# Altium PCB Thruster Driver Board.PcbDoc (part 1 of 2)
Units mil, origin at the board's own origin, x right, y up, seen from the top; angles counter-clockwise.
Board outline 7035 x 3025 mil, 4 copper layers (Top Layer, Ground Plane, Power Plane, Bottom Layer); 146 components, 107 nets, 533 pads, 443 vias.
Unrouted connection lines stored in the file: 1.
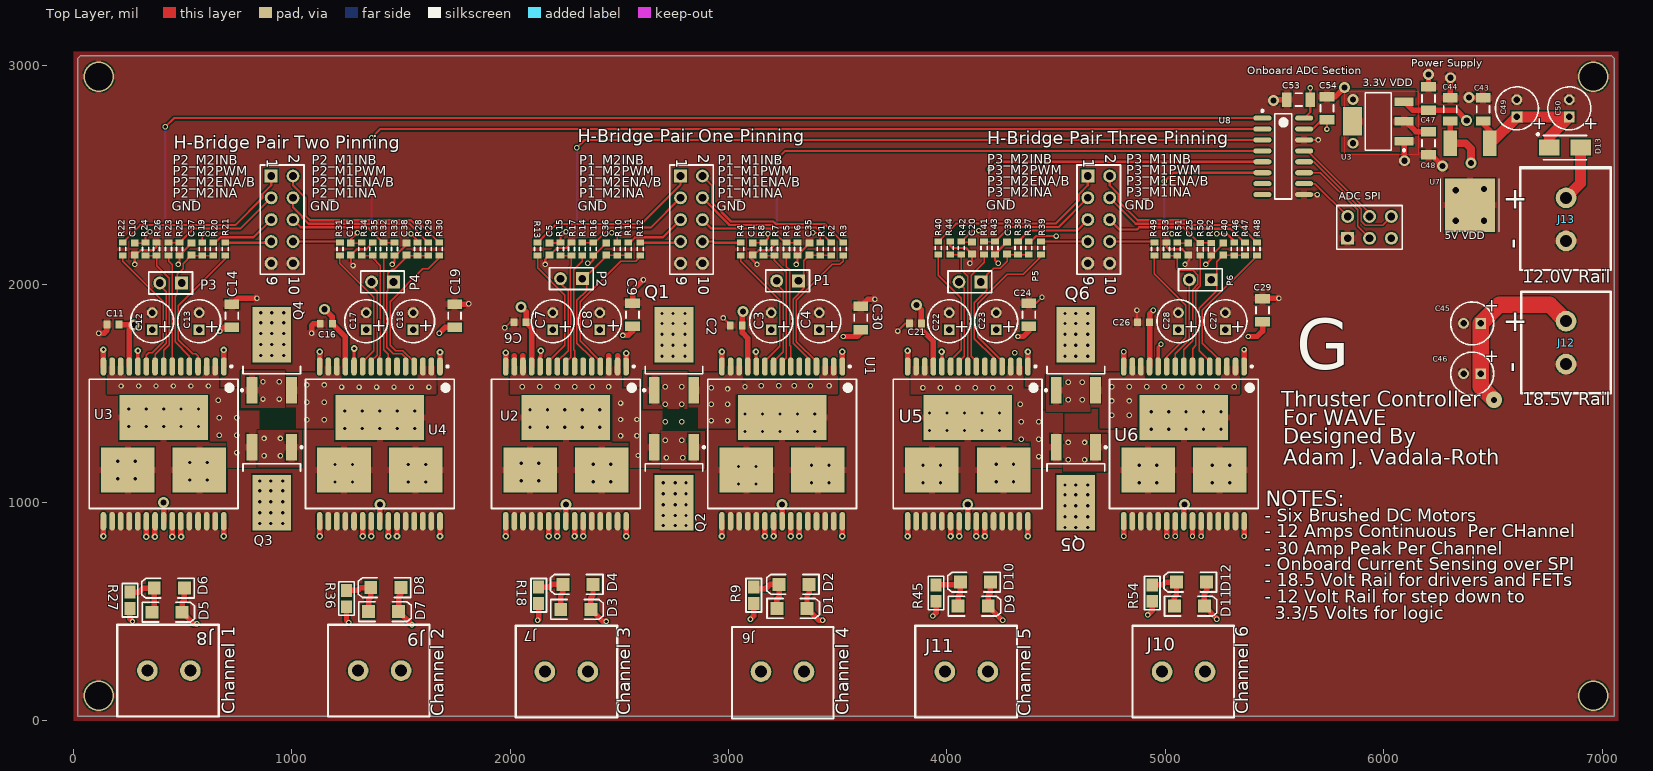
[diagram p0: Top Layer view]
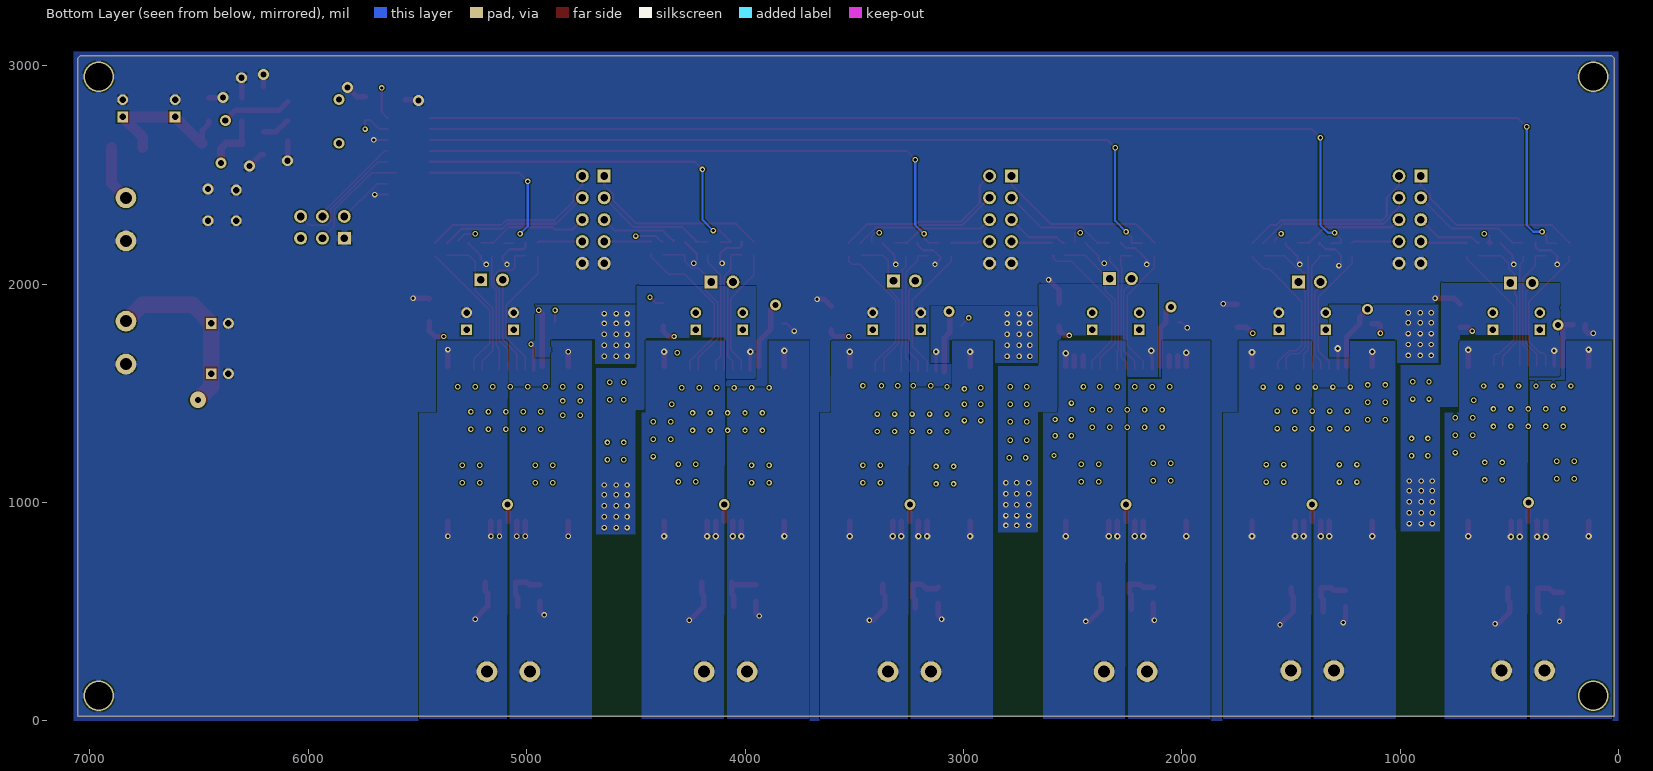
[diagram p1: Bottom Layer view, seen from below]
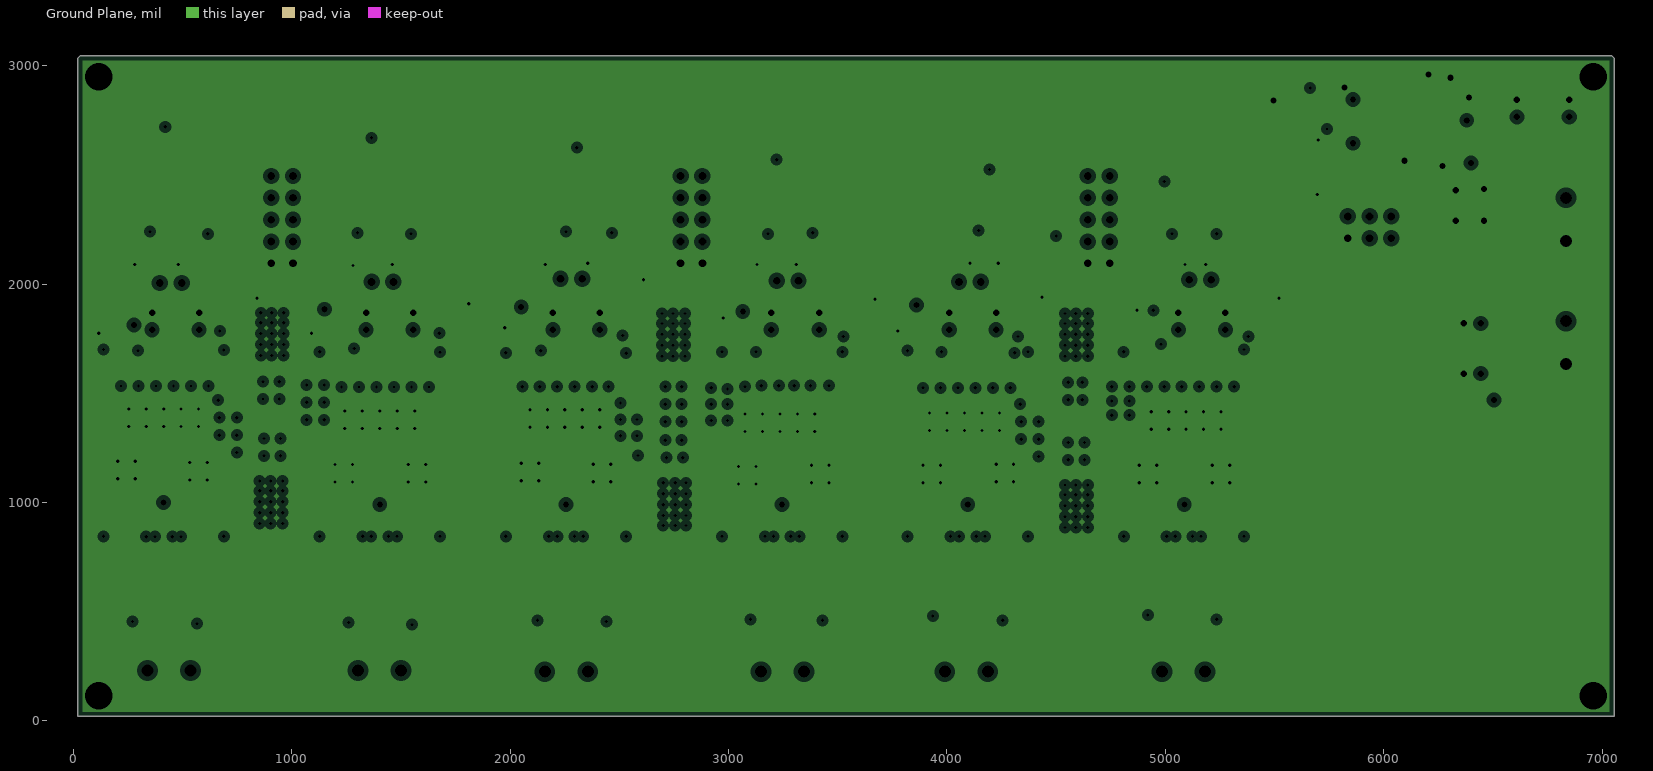
[diagram p2: Ground Plane, clearances drawn from the general rule]
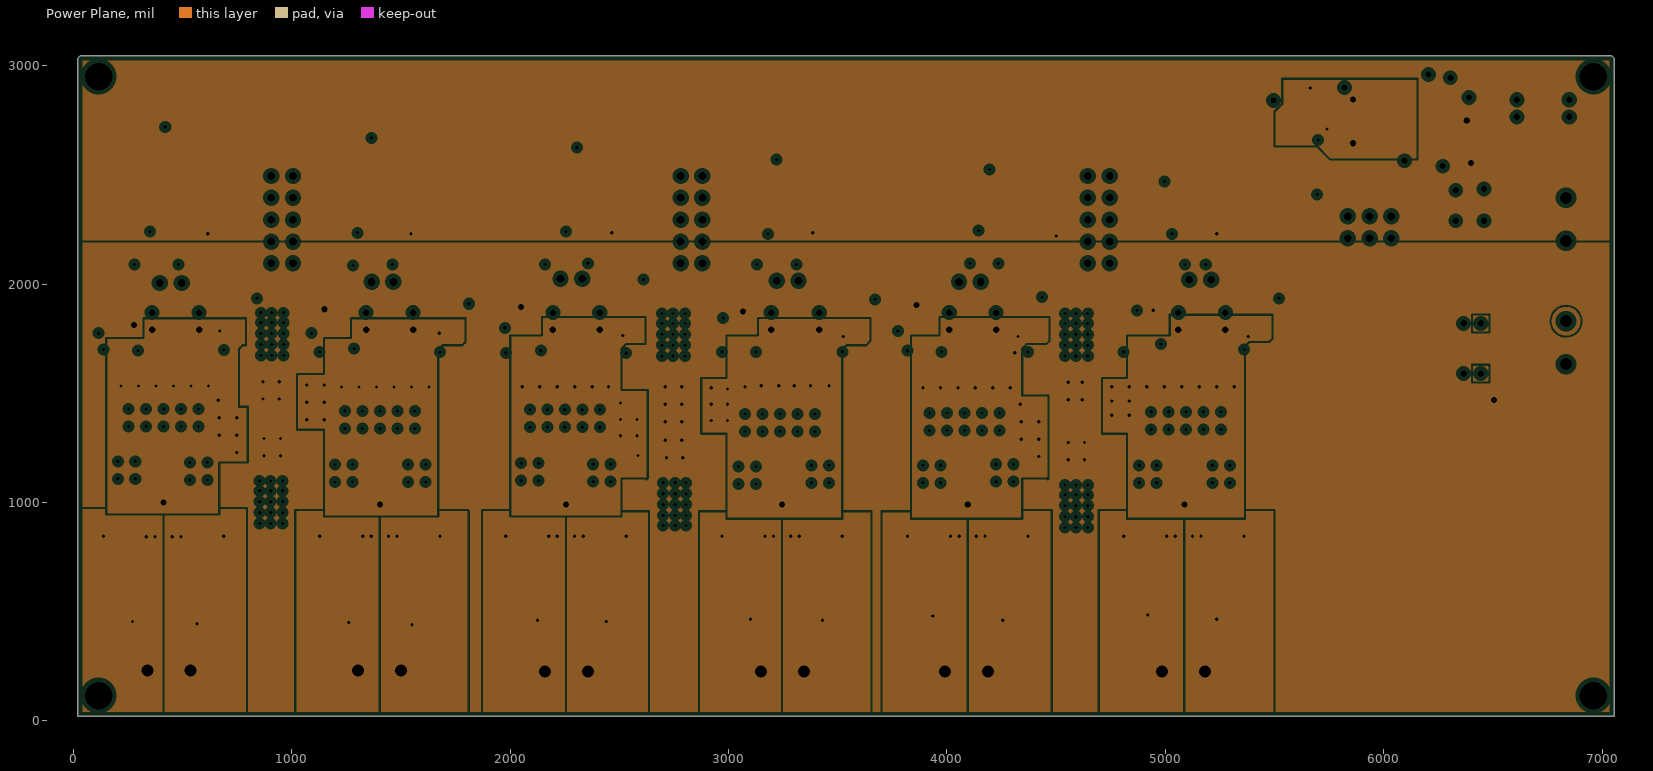
[diagram p3: Power Plane, clearances drawn from the general rule]

## Layer stack, top to bottom
Top Layer: signal copper 1.4
Dielectric: core 12.6, FR-4, Dk 4.8
Ground Plane: plane copper 1.4, net GND
Dielectric: prepreg 12.6, FR-4, Dk 4.8
Power Plane: plane copper 1.4, net (Multiple Nets)
Dielectric: core 12.6, FR-4, Dk 4.8
Bottom Layer: signal copper 1.4

## Board outline
20,20 7055,20 7055,3035 7045,3045 30,3045 20,3035

## Design rules (kind name [scope] priority, off if disabled: settings)
Clearance [All] p1: gap=6
HoleSize [All] p1: absolutevalues=TRUE maxlimit=100 minlimit=15 maxpercent=80.000 minpercent=20.000
HoleToHoleClearance [All] p1: gap=6 allowstackedmicrovias=TRUE
PlaneClearance [All] p1: clearance=20
PlaneConnect [All] p1: planeconnectstyle=Relief reliefexpansion=10 reliefentries=4 reliefconductorwidth=15 reliefairgap=5
PolygonConnect [All] p1: connectstyle=Relief reliefconductorwidth=30 reliefentries=4 polygonreliefangle="90 Angle"
RoutingVias [All] p1: holewidth=28 width=50 viastyle="Through Hole" minholewidth=15 minwidth=25 maxholewidth=28 maxwidth=50
SilkscreenOverComponentPads [All] p1: minsilkscreentomaskgap=10
SolderMaskExpansion [All] p1: expansion=4
Width [All] p1: maxlimit=100 minlimit=6 preferedwidth=6
23 further rules are at their usual default settings.

## Classes and differential pairs
component class "Motor and Power IO": C43 C44 C45 C46 C47 C48 C49 C50 D13 J6 J7 J8 J9 J10 J11 J12 J13 U3 U7
component class "AHD Breakout": "ADC SPI" C53 C54 P8 P9 P10 U8
component class "Thruster Pair 2": C10 C11 C12 C13 C14 C15 C16 C17 C18 C19 C37 C38 D5 D6 D7 D8 P3 P4 Q3 Q4 R19 R20 R21 R22 R23 R24 R25 R26 R27 R28 R29 R30 R31 R32 R33 R34 R35 R36 U4
component class "Thruster Pair 1": C1 C2 C3 C4 C5 C6 C7 C8 C9 C30 C35 C36 D1 D2 D3 D4 P1 P2 Q1 Q2 R1 R2 R3 R4 R5 R6 R7 R8 R9 R10 R11 R12 R13 R14 R15 R16 R17 R18 U1 U2
component class "Thruster Pair 3": C20 C21 C22 C23 C24 C25 C26 C27 C28 C29 C39 C40 D9 D10 D11 D12 P5 P6 Q5 Q6 R37 R38 R39 R40 R41 R42 R43 R44 R45 R46 R47 R48 R49 R50 R51 R52 R53 R54 U5 U6

## Components (designator, comment, footprint, x,y, rotation, side; value= is the part's Value field where it differs from the comment)
"ADC SPI" "Header 3X2" HDR2X3 5835,2210 r0 top
C1 "Cap Semi" 1608[0603] 3110,2160 r90 top
C2 "Cap Semi" 1608[0603] 3035,1810 r0 top
C3 "Cap Pol2" CAPPR2-5x6.8 3195,1830 r90 top
C4 "Cap Pol2" CAPPR2-5x6.8 3415,1830 r90 top
C5 "Cap Semi" 1608[0603] 2180,2160 r90 top
C6 "Cap Semi" 1608[0603] 2045,1825 r0 top
C7 "Cap Pol2" CAPPR2-5x6.8 2195,1830 r90 top
C8 "Cap Pol2" CAPPR2-5x6.8 2410,1830 r90 top
C9 "Cap Semi" C1206 2560,1860 r270 top
C10 "Cap Semi" 1608[0603] 280,2160 r90 top
C11 "Cap Semi" 1608[0603] 180,1815 r0 top
C12 "Cap Pol2" CAPPR2-5x6.8 360,1830 r90 top
C13 "Cap Pol2" CAPPR2-5x6.8 575,1830 r90 top
C14 "Cap Semi" C1206 725,1855 r270 top
C15 "Cap Semi" 1608[0603] 1270,2160 r90 top
C16 "Cap Semi" 1608[0603] 1157.61,1818.34 r0 top
C17 "Cap Pol2" CAPPR2-5x6.8 1340,1830 r90 top
C18 "Cap Pol2" CAPPR2-5x6.8 1555,1830 r90 top
C19 "Cap Semi" C1206 1745,1855 r270 top
C20 "Cap Semi" 1608[0603] 4115,2165 r90 top
C21 "Cap Semi" 1608[0603] 3855,1820 r0 top
C22 "Cap Pol2" CAPPR2-5x6.8 4010,1830 r90 top
C23 "Cap Pol2" CAPPR2-5x6.8 4225,1830 r90 top
C24 "Cap Semi" C1206 4375,1860 r270 top
C25 "Cap Semi" 1608[0603] 5105,2160 r90 top
C26 "Cap Semi" 1608[0603] 4900,1825 r0 top
C27 "Cap Pol2" CAPPR2-5x6.8 5275,1830 r90 top
C28 "Cap Pol2" CAPPR2-5x6.8 5060,1830 r90 top
C29 "Cap Semi" C1206 5445,1880 r270 top
C30 "Cap Semi" C1206 3605,1845 r270 top
C35 "Cap Semi" 1608[0603] 3370,2160 r270 top
C36 "Cap Semi" 1608[0603] 2440,2160 r270 top
C37 "Cap Semi" 1608[0603] 540,2160 r270 top
C38 "Cap Semi" 1608[0603] 1525,2160 r270 top
C39 "Cap Semi" 1608[0603] 4275,2165 r270 top
C40 "Cap Semi" 1608[0603] 5265,2160 r270 top
C43 "Cap Semi" C1206 6455,2800 r270 top
C44 "Cap Semi" C1206 6305,2800 r270 top
C45 "Cap Pol2" CAPPR2-5x6.8 6405,1820 r180 top
C46 "Cap Pol2" CAPPR2-5x6.8 6405,1590 r180 top
C47 "Cap Semi" C1206 6205,2850 r270 top
C48 "Cap Semi" C1206 6205,2645 r90 top
C49 "Cap Pol2" CAPPR2-5x6.8 6610,2805 r90 top
C50 "Cap Pol2" CAPPR2-5x6.8 6850,2805 r90 top
C53 "Cap Semi" C1206 5610,2845 r180 top
C54 "Cap Semi" C1206 5740,2805 r90 top
D1 "LED2" 3.2X1.6X1.1 3290,515 r0 top
D2 "LED2" 3.2X1.6X1.1 3300,625 r180 top
D3 "LED2" 3.2X1.6X1.1 2300,510 r0 top
D4 "LED2" 3.2X1.6X1.1 2310,625 r180 top
D5 "LED2" 3.2X1.6X1.1 428.34,497.39 r0 top
D6 "LED2" 3.2X1.6X1.1 438.34,607.39 r180 top
D7 "LED2" 3.2X1.6X1.1 1420,500 r0 top
D8 "LED2" 3.2X1.6X1.1 1430,610 r180 top
D9 "LED2" 3.2X1.6X1.1 4120,525 r0 top
D10 "LED2" 3.2X1.6X1.1 4130,635 r180 top
D11 "LED2" 3.2X1.6X1.1 5110,525 r0 top
D12 "LED2" 3.2X1.6X1.1 5120,635 r180 top
D13 "PMEG4050EP" PMEG4050EP 6830,2625 r0 top
"H-Bridge Pair One Pinning" "Header 5X2" HDR2X5 2780,2495 r270 top (schematic designator P8)
"H-Bridge Pair Three Pinning" "Header 5X2" HDR2X5 4645,2495 r270 top (schematic designator P10)
"H-Bridge Pair Two Pinning" "Header 5X2" HDR2X5 905,2495 r270 top locked (schematic designator P9)
J6 "282856-2" 282856-2 3345,225 r180 top
J7 "282856-2" 282856-2 2355,225 r180 top
J8 "282856-2" 282856-2 535,230 r180 top
J9 "282856-2" 282856-2 1500,230 r180 top
J10 "282856-2" 282856-2 4985,225 r0 top
J11 "282856-2" 282856-2 3990,225 r0 top
J12 "282856-2" 282856-2 6835,1830 r270 top
J13 "282856-2" 282856-2 6835,2395 r270 top
P1 "Header 2" HDR1X2 3320,2015 r180 top
P2 "Header 2" HDR1X2 2330,2025 r180 top
P3 "Header 2" HDR1X2 495,2005 r180 top
P4 "Header 2" HDR1X2 1465,2010 r180 top
P5 "Header 2" HDR1X2 4155,2010 r180 top
P6 "Header 2" HDR1X2 5210,2020 r180 top
Q1 "IRFR3707ZPBF" IRFR3707ZPBF 2750,1673.34 r90 top
Q2 "IRFR3707ZPBF" IRFR3707ZPBF 2750,1093.34 r270 top
Q3 "IRFR3707ZPBF" IRFR3707ZPBF 907.61,1093.34 r270 top
Q4 "IRFR3707ZPBF" IRFR3707ZPBF 907.61,1673.34 r90 top
Q5 "IRFR3707ZPBF" IRFR3707ZPBF 4590,1093.34 r270 top
Q6 "IRFR3707ZPBF" IRFR3707ZPBF 4590,1673.34 r90 top
R1 "Res3" RESC1608L 3420,2160 r90 top
R2 "Res3" RESC1608L 3470,2160 r270 top
R3 "Res3" RESC1608L 3525,2160 r270 top
R4 "Res3" RESC1608L 3055,2160 r270 top
R5 "Res3" RESC1608L 3265,2160 r270 top
R6 "Res3" RESC1608L 3315,2160 r90 top
R7 "Res3" RESC1608L 3210,2160 r270 top
R8 "Res3" RESC1608L 3160,2160 r270 top
R9 "Res3" "0805 SMD Resistor" 3115,575 r90 top
R10 "Res3" RESC1608L 2490,2160 r90 top
R11 "Res3" RESC1608L 2540,2160 r270 top
R12 "Res3" RESC1608L 2595,2160 r270 top
R13 "Res3" RESC1608L 2125,2160 r270 top
R14 "Res3" RESC1608L 2330,2160 r270 top
R15 "Res3" RESC1608L 2230,2160 r270 top
R16 "Res3" RESC1608L 2380,2160 r90 top
R17 "Res3" RESC1608L 2280,2160 r270 top
R18 "Res3" "0805 SMD Resistor" 2130,575 r90 top
R19 "Res3" RESC1608L 590,2160 r90 top
R20 "Res3" RESC1608L 640,2160 r270 top
R21 "Res3" RESC1608L 695,2160 r270 top
R22 "Res3" RESC1608L 225,2160 r270 top
R23 "Res3" RESC1608L 435,2160 r270 top
R24 "Res3" RESC1608L 330,2160 r270 top
R25 "Res3" RESC1608L 485,2160 r90 top
R26 "Res3" RESC1608L 380,2160 r270 top
R27 "Res3" "0805 SMD Resistor" 258.34,552.39 r90 top
R28 "Res3" RESC1608L 1575,2160 r90 top
R29 "Res3" RESC1608L 1625,2160 r270 top
R30 "Res3" RESC1608L 1675,2160 r270 top
R31 "Res3" RESC1608L 1220,2160 r270 top
R32 "Res3" RESC1608L 1420,2160 r270 top
R33 "Res3" RESC1608L 1470,2160 r90 top
R34 "Res3" RESC1608L 1320,2160 r270 top
R35 "Res3" RESC1608L 1370,2160 r270 top
R36 "Res3" "0805 SMD Resistor" 1250,560 r90 top
R37 "Res3" RESC1608L 4375,2165 r90 top
R38 "Res3" RESC1608L 4325,2165 r270 top
R39 "Res3" RESC1608L 4430,2165 r270 top
R40 "Res3" RESC1608L 3960,2165 r270 top
R41 "Res3" RESC1608L 4170,2165 r270 top
R42 "Res3" RESC1608L 4065,2165 r270 top
R43 "Res3" RESC1608L 4220,2165 r90 top
R44 "Res3" RESC1608L 4015,2165 r270 top
R45 "Res3" "0805 SMD Resistor" 3950,585 r90 top
R46 "Res3" RESC1608L 5315,2160 r90 top
R47 "Res3" RESC1608L 5365,2160 r270 top
R48 "Res3" RESC1608L 5420,2160 r270 top
R49 "Res3" RESC1608L 4950,2160 r270 top
R50 "Res3" RESC1608L 5160,2159.53 r270 top
R51 "Res3" RESC1608L 5055,2160 r270 top
R52 "Res3" RESC1608L 5210,2159.53 r90 top
R53 "Res3" RESC1608L 5005,2160 r270 top
R54 "Res3" "0805 SMD Resistor" 4940,585 r90 top
U1 "VNH5019A-E" VNH5019A-E 3245,1268.34 r270 top
U2 "VNH5019A-E" VNH5019A-E 2255,1268.34 r270 top
U3 "NX1117CE33Z" NX1117CE33Z 5975,2745 r180 top
U3 "VNH5019A-E" VNH5019A-E 412.61,1268.34 r270 top
U4 "VNH5019A-E" VNH5019A-E 1402.61,1268.34 r270 top
U5 "VNH5019A-E" VNH5019A-E 4095,1268.34 r270 top
U6 "VNH5019A-E" VNH5019A-E 5085,1268.34 r270 top
U7 "5V Reg" DPAK-3 6395,2645 r180 top
U8 "MCP3208" "MCP3208 - duplicate" 5540,2585 r0 top (schematic designator U4)

## Footprints (in the part's own frame and the unit in brackets; to place one, negate y for a bottom-side part, rotate by r counter-clockwise, add the part's x,y. Pads: shape width x height; smd on the part's side, far side on the other; paste and mask are expansions set on the pad)
3.2X1.6X1.1 [mm] "SMT LED; 2 Flat Leads"
  rect 1.5x1.5 smd: 1(-1.75,0) 2(1.75,0)
  silkscreen extent -2.9,-1.15 3.2,1.15
"0805 SMD Resistor" [mm]
  rect 1.5x1.3 smd: 1(-0.95,0) 2(0.95,0)
  silkscreen extent -1.95,-0.9 1.95,0.9
1608[0603] [mm] "Chip Capacitor, Body 1.6x0.8mm, IPC High Density"
  rect 0.8x0.9 smd: 1(-0.7,0) 2(0.7,0)
  body extent -0.87,-0.48 0.87,0.48, height 1.3
282856-2 [mm] "Screw Terminal  two pole"
  round 2.4 hole 1.4: 1(0,0) 2(5,0)
C1206 [mm] "Chip Capacitor, Body 3.2x1.6mm, IPC High Density"
  rect 1.1x1.7 smd: 1(-1.35,0) 2(1.35,0)
  silkscreen extent -0.4,-0.75 0.4,0.75, body extent -1.7,-0.9 1.7,0.9, height 1.3
CAPPR2-5x6.8 [mm] "Capacitor, Electrolytic, Radial; Body 5 x 6.8 mm (Dia.xH typ); Pin Spacing 2 mm (typ)"
  rect 1.25x1.25 hole 0.75: 1(-1,0)
  round 1.25 hole 0.75: 2(1,0)
  silkscreen extent -2.5,-2.5 2.5,2.5
DPAK-3 [mm] "Case 369C-01 for MC78xx regulators"
  rect 1.6x3 smd: 1(-2.3,0) 3(2.3,0)
  rect 5.8x6.2 smd: 2(0,7.2)
  silkscreen extent -3.4,4.1 3.4,10.3, body extent -3.4,4.1 3.4,10.3, height 2.38
HDR1X2 [mm] "Connector; Header; 2 Position"
  rect 1.5x1.5 hole 0.9: 1(0,0)
  round 1.5 hole 0.9: 2(2.54,0)
  silkscreen extent -1.27,-1.27 3.81,1.27
HDR2X3 [mm] "Connector; Header; 3x2 Position"
  rect 1.5x1.5 hole 0.9: 1(0,0)
  round 1.5 hole 0.9: 2(0,2.54) 3(2.54,0) 4(2.54,2.54) 5(5.08,0) 6(5.08,2.54)
  silkscreen extent -1.27,-1.27 6.35,3.81
HDR2X5 [mm] "Connector; Header; 5x2 Position"
  rect 1.5x1.5 hole 0.9: 1(0,0)
  round 1.5 hole 0.9: 2(0,2.54) 3(2.54,0) 4(2.54,2.54) 5(5.08,0) 6(5.08,2.54) 7(7.62,0) 8(7.62,2.54) 9(10.16,0) 10(10.16,2.54)
  silkscreen extent -1.27,-1.27 11.43,3.81
IRFR3707ZPBF [mm] "Power FET"
  rect 3.05x1.25 smd: 1(-4.05,2.29) 3(-4.05,-2.29)
  rect 6.5x4.5 smd: 4(2.4,0)
  silkscreen extent -4.17,-3.35 -1.25,3.59, body extent -2.5,-3.37 3.72,3.37, height 2.39
"MCP3208 - duplicate" [mm] "MCP3208 8 Channel ADC"
  oval 2.1x0.6 smd: 1(-2.425,4.445) 2(-2.425,3.175) 3(-2.425,1.905) 4(-2.425,0.635) 5(-2.425,-0.635) 6(-2.425,-1.905) 7(-2.425,-3.175) 8(-2.425,-4.445) 9(2.425,-4.445) 10(2.425,-3.175) 11(2.425,-1.905) 12(2.425,-0.635) 13(2.425,0.635) 14(2.425,1.905) 15(2.425,3.175) 16(2.425,4.445)
  silkscreen extent -2.55,-4.95 0.98,5.42, body extent -1.95,-4.95 1.95,4.95, height 1.25
NX1117CE33Z [mm] "3.3v linear regulator"
  rect 2.2x1 smd: 1(-3,2.3) 2(-3,0) 3(-3,-2.3)
  rect 2.2x3.3 smd: 4(3,0)
  silkscreen extent -3.13,-3.35 1.5,3.47, body extent -1.85,-3.35 1.85,3.35, height 1.8
PMEG4050EP [mm] "PMEG4050EP NXP SMD Schottky Diode"
  rect 2.35x1.85 smd: 1(-1.825,0) 2(1.825,0)
  silkscreen extent -3.27,-1.4 2.5,1.67, body extent -2.5,-1.35 2.5,1.35, height 1.1
RESC1608L [mm] "Chip Resistor, Body 1.6x0.8mm, IPC High Density"
  rect 0.7x0.9 smd: 1(-0.75,0) 2(0.75,0)
  silkscreen extent -0.2,-0.35 0.2,0.35, body extent -0.85,-0.48 0.85,0.48, height 0.6
VNH5019A-E [mm] "STMicroelectronics VNH5019A-E H-Bridge"
  oval 2.15x0.65 smd: 1(-9,7) 2(-9,6) 3(-9,5) 4(-9,4) 5(-9,3) 6(-9,2) 7(-9,1) 8(-9,0) 9(-9,-1) 10(-9,-2) 11(-9,-3) 12(-9,-4) 13(-9,-5) 14(-9,-6) 15(-9,-7) 16(9,-7) 17(9,-6) 18(9,-5) 19(9,-4) 20(9,-3) 21(9,-2) 22(9,-1) 23(9,0) 24(9,1) 25(9,2) 26(9,3) 27(9,4) 28(9,5) 29(9,6) 30(9,7)
  rect 5.25x10.3 smd: GND_THERMAL(-3.05,0)
  rect 5.25x6.23 smd: GND_THERMAL(3.05,4.165) GND_THERMAL(3.05,-4.165)
  silkscreen extent -9.12,-8.65 7.52,8.65, body extent -8.05,-8.65 8.05,8.65, height 2.35

## Part data
"ADC SPI": "Header, 3-Pin, Dual row"
C1 C2 C5 C6 C9 C10 C11 C14 C15 C16 C19 C20 C21 C24 C25 C26 C29 C30 C35 C36 C37 C38 C39 C40 C43 C44 C47 C48 C53 C54: "Capacitor (Semiconductor SIM Model)"
C3 C4 C7 C8 C12 C13 C17 C18 C22 C23 C27 C28 C45 C46 C49 C50: "Polarized Capacitor (Axial)"
D1 D2 D3 D4 D5 D6 D7 D8 D9 D10 D11 D12: "Typical RED, GREEN, YELLOW, AMBER GaAs LED"
D13: library part Diode, "Default Diode"
"H-Bridge Pair One Pinning" "H-Bridge Pair Three Pinning" "H-Bridge Pair Two Pinning": "Header, 5-Pin, Dual row"
J6 J7 J8 J9 J10 J11 J12 J13: "Two pole screw terminal"
P1 P2 P3 P4 P5 P6: "Header, 2-Pin"
Q1 Q2 Q3 Q4 Q5 Q6: "Power FET"
R1 R2 R3 R4 R5 R6 R7 R8 R9 R10 R11 R12 R13 R14 R15 R16 R17 R18 R19 R20 R21 R22 R23 R24 R25 R26 R27 R28 R29 R30 R31 R32 R33 R34 R35 R36 R37 R38 R39 R40 R41 R42 R43 R44 R45 R46 R47 R48 R49 R50 R51 R52 R53 R54: "Resistor"
U1 U2 U3 U4 U5 U6: "VNH5019A-E H-Bridge"
U3: "3.3v Linear Regulator"
U7: library part "VOLT REG", "Voltage regulator"

## Free pads (board coordinates)
  round 140 hole 125: ""(115,115) ""(115,2950) ""(6960,115) ""(6960,2950)

## Via types
v1: diameter 25, hole 15, Top Layer to Bottom Layer, 371 vias
v2: diameter 30, hole 15, Top Layer to Bottom Layer, 45 vias
v3: diameter 50, hole 28, Top Layer to Bottom Layer, 26 vias
v4: diameter 75, hole 28, Top Layer to Bottom Layer, 1 vias

## Nets (pads, with @x,y where several pads share a name; then routed paths per layer and width w, separated by ;. In a path a pad name is that pad's centre, name@x,y a point inside that pad or via, vN(x,y) a via of type N, cw(c..) or ccw(c..) an arc to the next point about the centre after c; other vN are vias at no path point)
CS: "ADC SPI.2" U8.10 | length 261.7
  Top Layer w6: U8.10@5635.47,2460 5685,2460 5835,2310
GND: "ADC SPI.1" "H-Bridge Pair One Pinning.9" "H-Bridge Pair One Pinning.10" "H-Bridge Pair Three Pinning.9" "H-Bridge Pair Three Pinning.10" "H-Bridge Pair Two Pinning.9" "H-Bridge Pair Two Pinning.10" C1.1 C2.1 C3.2 C4.2 C5.1 C6.1 C7.2 C8.2 C9.1 C10.1 C11.1 C12.2 C13.2 C14.1 C15.1 C16.1 C17.2 C18.2 C19.1 C20.1 C21.1 C22.2 C23.2 C24.1 C25.1 C26.1 C27.2 C28.2 C29.1 C30.1 C35.1 C36.1 C37.1 C38.1 C39.1 C40.1 C43.1 C44.1 C45.2 C46.2 C47.1 C48.1 C49.2 C50.2 C53.2 C54.2 J12.2 J13.2 pad. R6.1 R7.1 R16.1 R17.1 R25.1 R26.1 R33.1 R35.1 R43.1 R44.1 R52.1 R53.1 U1.17 U1.18 U1.19 U1.20 U1.26 U1.27 U1.28 U1.29 U1.GND_THERMAL U2.17 U2.18 U2.19 U2.20 U2.26 U2.27 U2.28 U2.29 U2.GND_THERMAL U3.1@6093.11,2654.45 U3.17 U3.18 U3.19 U3.20 U3.26 U3.27 U3.28 U3.29 U3.GND_THERMAL U4.17 U4.18 U4.19 U4.20 U4.26 U4.27 U4.28 U4.29 U4.GND_THERMAL U5.17 U5.18 U5.19 U5.20 U5.26 U5.27 U5.28 U5.29 U5.GND_THERMAL U6.17 U6.18 U6.19 U6.20 U6.26 U6.27 U6.28 U6.29 U6.GND_THERMAL U7.2 U8.9 U8.14 | length 3443.8
  Top Layer w6: v1(5185,2090) v1@5195,2090
  Top Layer w10: v1(280,2090) 280,2127.52 307.73,2155.25 365.25,2155.25 380,2170 R26.1@380,2189.53 ; v1(480,2090) 485,2095 R25.1@485,2130.47 485,2132.56 C37.1@540,2187.56 ; v1(1280,2085) 1270,2095 C15.1@1270,2132.44 1297.56,2160 1340.47,2160 R35.1@1370,2189.53 R35.1@1370,2181.87 ; v1(1460,2090) 1470,2100 R33.1@1470,2130.47 ; R33.1@1474.01,2130.47 1502.73,2159.19 1504.19,2159.19 1525,2180 C38.1@1525,2187.56 ; v1@1808.15,1908.15 v1(1810,1910) ; v1(1975,1800) 2000,1825 C6.1@2017.44,1825 ; v1(2160,2090) 2160,2112.44 C5.1@2180,2132.44 2212.31,2164.75 2255.22,2164.75 R17.1@2280,2189.53 ; v1(2355,2095) 2365,2095 2380,2110 2380,2127.56 C36.1@2440,2187.56 ; v1(2975,1845) 3007.44,1812.56 C2.1@3007.44,1810 ; v1(3130,2090) 3105,2115 3105,2122.52 3137.73,2155.25 3185.25,2155.25 3210,2180 R7.1@3210,2189.53 ; v1(3310,2090) 3315,2095 R6.1@3315,2130.47 3315,2132.56 C35.1@3370,2187.56 ; v1(3775,1785) 3810,1820 C21.1@3827.44,1820 ; R44.1@4015,2194.53 4015,2175 4025,2165 4087.44,2165 C20.1@4115,2137.44 4115,2105 v1(4105,2095) ; R43.1@4220,2135.47 4220,2110 v1(4235,2095) ; R43.1@4220,2137.56 C39.1@4275,2192.56 ; C24.1@4375,1913.15 4408.15,1913.15 v1(4435,1940) ; v1(4870,1880) 4870,1827.44 C26.1@4872.44,1825 ; R53.1@5005,2189.53 5005,2170 5015,2160 5077.44,2160 C25.1@5105,2132.44 5110,2127.44 5110,2110 v1(5090,2090) ; v1(5185,2090) 5210,2115 R52.1@5210,2130 5265,2185 C40.1@5265,2187.56 ; U8.9@5635.47,2410 v1(5695,2410) ; U8.14@5635.47,2660 v1(5700,2660)
  Top Layer w25: v1(115,1775) 140,1775 152.44,1787.44 C11.1@152.44,1815 ; C14.1@725,1908.15 751.85,1935 v1(840,1935) ; v1(1090,1775) 1090,1810 1098.34,1818.34 C16.1@1130.06,1818.34 ; C19.1@1745,1908.15 v1@1808.15,1908.15 ; C9.1@2560,1913.15 2560,1970 v1(2610,2020) ; C30.1@3605,1898.15 3636.85,1930 v1(3670,1930) ; C29.1@5445,1933.15 5446.85,1935 v1(5520,1935) ; v3(5495,2840) 5500,2845 C53.2@5556.85,2845 ; C54.2@5740,2858.15 5778.15,2858.15 v3(5820,2900) ; U3.1@6093.11,2654.45 6093.11,2566.89 v3(6095,2565) ; C48.1@6205,2591.85 6218.15,2591.85 v3(6270,2540) ; C47.1@6205,2903.15 v3(6205,2960) ; C44.1@6305,2853.15 v3(6305,2945) ; v3(6390,2855) 6391.85,2853.15 C43.1@6455,2853.15
  other v1: 3045,1085 3125,1085 3380,1090 3460,1090 3890,1090 3970,1090 4880,1090 4960,1090 5215,1090 5295,1090 1197.61,1093.34 1277.61,1093.34 1532.61,1093.34 1612.61,1093.34 2380,1095 2460,1095 4225,1095 4305,1095 2050,1100 2130,1100 532.61,1103.34 612.61,1103.34 202.61,1108.34 282.61,1108.34 3045,1165 3125,1165 3380,1170 3460,1170 3890,1170 3970,1170 4880,1170 4960,1170 5215,1170 5295,1170 1197.61,1173.34 1277.61,1173.34 1532.61,1173.34 1612.61,1173.34 2380,1175 2460,1175 4225,1175 4305,1175 2050,1180 2130,1180 532.61,1183.34 612.61,1183.34 202.61,1188.34 282.61,1188.34 3075,1325 3155,1325 3235,1325 3315,1325 3395,1325 3920,1330 4000,1330 4080,1330 4160,1330 4240,1330 4935,1335 5015,1335 5095,1335 5175,1335 5255,1335 1242.61,1338.34 1322.61,1338.34 1402.61,1338.34 1482.61,1338.34 1562.61,1338.34 2090,1345 2170,1345 2250,1345 2330,1345 2410,1345 252.61,1348.34 332.61,1348.34 412.61,1348.34 492.61,1348.34 572.61,1348.34 3075,1405 3155,1405 3235,1405 3315,1405 3395,1405 3920,1410 4000,1410 4080,1410 4160,1410 4240,1410 4935,1415 5015,1415 5095,1415 5175,1415 5255,1415 1242.61,1418.34 1322.61,1418.34 1402.61,1418.34 1482.61,1418.34 1562.61,1418.34 2090,1425 2170,1425 2250,1425 2330,1425 2410,1425 252.61,1428.34 332.61,1428.34 412.61,1428.34 492.61,1428.34 572.61,1428.34
  other v3: 6330,2290 6460,2290 6330,2430 6460,2435
MISO: "ADC SPI.6" U8.12 | length 568.4
  Top Layer w6: U8.12@5635.47,2560 5680,2560 5896.47,2343.53 5896.47,2288.53 5915,2270 5995,2270 6035,2310
MOSI: "ADC SPI.3" U8.11 | length 508.2
  Top Layer w6: U8.11@5595,2510 U8.11@5635.47,2510 5710,2510 5880,2340 5880,2265.47 5935,2210.47 5935,2210
NetC3_1: C3.1 C4.1 C30.2 Q1.3 U1.2 U1.3 U1.13 U1.14 U1.23 | length 179.1
  Top Layer w25: U1.23@3245,914.01 v3(3245,990) ; v1(3525,1760) 3590,1760 3605,1775 C30.2@3605,1791.85
  other v1: 2920,1375 2995,1375 2920,1450 2995,1450 2995,1520 2920,1525 3075,1530 3150,1535 3230,1535 3300,1535 3375,1535 3460,1535
NetC7_1: C7.1 C8.1 C9.2 Q2.3 U2.2 U2.3 U2.13 U2.14 U2.23 | length 345.9
  Top Layer w25: U2.14@2018.78,1622.67 2018.78,1671.36 ; U2.13@2058.15,1622.67 2058.15,1671.36 ; U2.23@2255,914.01 v3(2255,990) ; U2.3@2451.85,1622.67 2451.85,1671.36 ; U2.2@2491.22,1622.67 2491.22,1671.36 ; v1(2515,1765) 2540,1765 2560,1785 C9.2@2560,1806.85
  other v1: 2585,1215 2505,1305 2580,1305 2505,1380 2580,1380 2505,1455 2055,1530 2135,1530 2215,1530 2295,1530 2375,1530 2450,1530
NetC12_1: C12.1 C13.1 C14.2 Q3.3 U3.2@648.83,1622.67 U3.3@609.46,1622.67 U3.13 U3.14 U3.23 | length 148
  Top Layer w25: U3.23@412.61,914.01 v3(412.61,1000) ; v1(670,1785) 686.85,1801.85 C14.2@725,1801.85
  other v1: 747.61,1228.34 667.61,1308.34 747.61,1308.34 667.61,1388.34 747.61,1388.34 662.61,1468.34 217.61,1533.34 297.61,1533.34 377.61,1533.34 457.61,1533.34 537.61,1533.34 617.61,1533.34
NetC17_1: C17.1 C18.1 C19.2 Q4.3 U4.2 U4.3 U4.13 U4.14 U4.23 | length 157.1
  Top Layer w25: U4.23@1402.61,914.01 v3(1402.61,990) ; v1(1675,1775) 1701.85,1801.85 C19.2@1745,1801.85
  other v1: 1067.61,1378.34 1147.61,1378.34 1067.61,1458.34 1147.61,1458.34 1227.61,1528.34 1307.61,1528.34 1387.61,1528.34 1467.61,1528.34 1547.61,1528.34 1627.61,1528.34 1067.61,1538.34 1147.61,1538.34
NetC22_1: C22.1 C23.1 C24.2 Q5.3 U5.2 U5.3 U5.13 U5.14 U5.23 | length 158.2
  Top Layer w25: U5.23@4095,914.01 v3(4095,990) ; v1(4325,1760) 4350,1760 4375,1785 C24.2@4375,1806.85
  other v1: 4420,1210 4340,1290 4420,1290 4340,1370 4420,1370 4335,1450 3890,1525 3970,1525 4050,1525 4130,1525 4210,1525 4290,1525 4310,1685
NetC27_1: C27.1 C28.1 C29.2 Q6.3 U6.2 U6.3 U6.13 U6.14 U6.23 | length 191.3
  Top Layer w25: U6.23@5085,914.01 v3@5085,988.15 ; v1(5380,1760) 5420,1760 5445,1785 C29.2@5445,1826.85
  other v1: 4755,1400 4835,1400 4755,1465 4835,1465 4755,1530 4835,1530 4915,1530 4995,1530 5075,1530 5155,1530 5235,1530 5315,1530
  other v3: 5086.85,990
NetC39_2: C39.2 P5.1 R37.1 R38.2 U5.5 | length 790.4
  Top Layer w6: P5.1@4155,1995 P5.1@4155,2010 P5.1@4155,2035 ; U5.5@4213.11,1604.33 4213.03,1604.41 4213.03,1661.97 4125,1750 4125,1915 4182.5,1972.5 4182.5,2042.5 4213.5,2073.5 4243.91,2073.5 4275,2104.59 C39.2@4275,2137.44 4276.97,2135.47 R37.1@4375,2135.47
NetC40_2: C40.2 P6.1 R46.1 R47.2 U6.5 | length 694.4
  Top Layer w6: U6.5@5203.11,1604.33 5203.11,1646.89 5155,1695 5155,1890 5235,1970 5235,2102.44 C40.2@5265,2132.44 5363.03,2132.44 R47.2@5365,2130.47
NetD1_1: D1.1 D2.2 R9.2 | length 241.6
  Top Layer w25: R9.2@3115,612.4 3122.4,605 3170,605 3190,625 D2.2@3231.1,625 3231.1,566.1 3221.1,556.1 D1.1@3221.1,515
NetD3_1: D3.1 D4.2 R18.2 | length 235.5
  Top Layer w25: R18.2@2130,612.4 2177.4,612.4 2190,625 D4.2@2241.1,625 2241.1,586.1 2231.1,576.1 D3.1@2231.1,510
NetD5_1: D5.1 D6.2 R27.2 | length 232.5
  Top Layer w25: R27.2@258.34,589.79 299.79,589.79 317.39,607.39 D6.2@369.44,607.39 369.44,507.39 D5.1@359.44,497.39
NetD7_1: D7.1 D8.2 R36.2 | length 230.5
  Top Layer w25: R36.2@1250,597.4 1302.4,597.4 1315,610 D8.2@1361.1,610 1361.1,566.1 1351.1,556.1 D7.1@1351.1,500
NetD9_1: D9.1 D10.2 R45.2 | length 230.5
  Top Layer w25: R45.2@3950,622.4 4048.5,622.4 D10.2@4061.1,635 4061.1,581.1 4051.1,571.1 D9.1@4051.1,525
NetD11_1: D11.1 D12.2 R54.2 | length 230.5
  Top Layer w25: R54.2@4940,622.4 4987.4,622.4 5000,635 D12.2@5051.1,635 5051.1,576.1 5041.1,566.1 D11.1@5041.1,525
NetD13_1: D13.2 J13.1 | length 257.7
  Top Layer w50: J13.1@6835,2395 6901.85,2461.85 D13.2@6901.85,2625
NetP1_2: P1.2 U1.9 | length 446.5
  Top Layer w6: U1.9@3205.63,1599.33 3205.63,1645.63 3250,1690 3250,1970 3220,2000 P1.2@3220,2015
NetP2_2: P2.2 U2.9 | length 450.6
  Top Layer w6: U2.9@2215.63,1609.33 2215.63,1645.63 2265,1695 2265,1970 2230,2005 P2.2@2230,2025
NetP3_2: P3.2 U3.9 | length 416.2
  Top Layer w6: U3.9@373.24,1622.67 373.24,1678.24 425,1730 425,1965 395,1995 P3.2@395,2005
NetP4_2: P4.2 U4.9 | length 418.8
  Top Layer w6: U4.9@1363.24,1612.67 1363.24,1648.24 1390,1675 1390,1965 1365,1990 P4.2@1365,2010
NetP5_2: P5.2 U5.9 | length 426.2
  Top Layer w6: P5.2@4055,2010 4055,2005 4080,1980 4080,1670 4055.63,1645.63 U5.9@4055.63,1604.33
NetP6_2: P6.2 U6.9 | length 447.3
  Top Layer w6: U6.9@5045.63,1604.33 5045.63,1680.63 5110,1745 P6.2@5110,2025
NetQ1_4: Q1.4 U1.11 | length 91.5
  Top Layer w6: U1.11@3125,1601.22 U1.11@3126.89,1599.33
  Top Layer w15: U1.11@3125,1601.22 v2(3125,1690)
  other v1: 2695,1670 2745,1670 2800,1670 2695,1720 2745,1720 2800,1720 2695,1770 2745,1770 2800,1770 2695,1820 2745,1820 2800,1820 2695,1865 2745,1865 2800,1865
NetQ2_4: Q2.4 U2.11 | length 85.9
  Top Layer w15: U2.11@2135,1611.22 2135,1665 2140,1670 v2(2140,1695)
  other v1: 2700,895 2755,895 2805,895 2700,940 2755,940 2805,940 2700,990 2755,990 2805,990 2700,1040 2755,1040 2805,1040 2700,1090 2755,1090 2805,1090
NetQ3_4: Q3.4 U3.11 | length 72.5
  Top Layer w6: v2@294.5,1694.5 v2(295,1695)
  Top Layer w15: U3.11@294.5,1622.67 v2@294.5,1694.5
  other v1: 852.61,903.34 902.61,903.34 957.61,903.34 852.61,953.34 902.61,953.34 957.61,953.34 852.61,1003.34 902.61,1003.34 957.61,1003.34 852.61,1053.34 902.61,1053.34 957.61,1053.34 852.61,1098.34 902.61,1098.34 957.61,1098.34
NetQ4_4: Q4.4 U4.11 | length 92.5
  Top Layer w6: v2@1284.5,1704.5 v2(1285,1705)
  Top Layer w15: U4.11@1284.5,1612.67 v2@1284.5,1704.5
  other v1: 857.61,1673.34 907.61,1673.34 962.61,1673.34 857.61,1723.34 907.61,1723.34 962.61,1723.34 857.61,1773.34 907.61,1773.34 962.61,1773.34 857.61,1823.34 907.61,1823.34 962.61,1823.34 857.61,1868.34 907.61,1868.34 962.61,1868.34
NetQ5_4: Q5.4 U5.11 | length 83.8
  Top Layer w15: U5.11@3976.89,1604.33 v2@3976.89,1688.11
  other v1: 4540,885 4590,885 4645,885 4540,935 4590,935 4645,935 4540,985 4590,985 4645,985 4540,1035 4590,1035 4645,1035 4540,1080 4590,1080 4645,1080
  other v2: 3975,1690
NetQ6_4: Q6.4 U6.11 | length 126.1
  Top Layer w15: U6.11@4966.89,1604.33 4966.89,1711.89 v1(4980,1725)
  other v1: 4540,1670 4590,1670 4645,1670 4540,1720 4590,1720 4645,1720 4540,1770 4590,1770 4645,1770 4540,1820 4590,1820 4645,1820 4540,1865 4590,1865 4645,1865
NetR3_2: R3.2 U1.4 | length 679
  Top Layer w6: U1.4@3402.48,1599.33 3402.48,1643.65 3310,1736.13 3310,1925 3475,2090 3510,2090 3525,2105 R3.2@3525,2130.47
NetR4_2: R4.2 U1.10 | length 634.2
  Top Layer w6: R4.2@3055,2130.47 3055,2105 3235,1925 3235,1715 3166.26,1646.26 U1.10@3166.26,1599.33
NetR5_2: R5.2 U1.7 | length 539.7
  Top Layer w6: R5.2@3265,2130.47 3265,2080 3280,2065 3280,1720 3285,1715 3285,1599.96 U1.7@3284.37,1599.33
NetR7_2: R7.2 R8.2 U1.8 | length 612.2
  Top Layer w6: R8.2@3160,2130.47 R7.2@3210,2130.47 3210,2110 3265,2055 3265,1663.65 3245,1643.65 U1.8@3245,1599.33
NetR12_2: R12.2 U2.4 | length 730.2
  Top Layer w6: U2.4@2412.48,1609.33 2412.48,1647.52 2320,1740 2320,1920 2505,2105 2574.06,2105 2590,2120.94 2580.47,2130.47 R12.2@2595,2130.47
NetR13_2: R13.2 U2.10 | length 603.5
  Top Layer w6: R13.2@2125,2130.47 2125,2075 2250,1950 2250,1720 2176.26,1646.26 U2.10@2176.26,1609.33
NetR14_2: R14.2 U2.7 | length 540
  Top Layer w6: U2.7@2294.37,1609.33 2295,1609.96 2295,1695 2290,1700 2290,2065 2330,2105 R14.2@2330,2130.47
NetR15_2: R15.2 R17.2 U2.8 | length 583.2
  Top Layer w6: R15.2@2230,2130.47 R17.2@2280,2130.47 2280,2085 2275,2080 2275,1976.97 2277,1974.97 2277,1665.65 2255,1643.65 U2.8@2255,1609.33
NetR21_2: R21.2 U3.4@570.09,1622.67 | length 643
  Top Layer w6: U3.4@570.09,1622.67 570.09,1669.91 560,1680 545,1680 480,1745 480,1900 695,2115 R21.2@695,2130.47
NetR22_2: R22.2 U3.10 | length 624.8
  Top Layer w6: R22.2@225,2130.47 225,2105 410,1920 410,1735 360,1685 345,1685 333.87,1673.87 U3.10@333.87,1622.67
NetR23_2: R23.2 U3.7 | length 514.9
  Top Layer w6: R23.2@435,2130.47 435,2105 452,2088 U3.7@451.98,1622.67
NetR24_2: R24.2 R26.2 U3.8 | length 591.9
  Top Layer w6: R24.2@330,2130.47 R26.2@380,2130.47 380,2085 437.5,2027.5 437.5,1722.5 412.61,1697.61 U3.8@412.61,1622.67
NetR30_2: R30.2 U4.4 | length 691
  Top Layer w6: U4.4@1560.09,1612.67 1560.09,1643.65 1508.74,1695 1475,1695 1450,1720 1450,1920 1600,2070 1625,2070 1675,2120 R30.2@1675,2130.47
NetR31_2: R31.2 U4.10 | length 603.2
  Top Layer w6: R31.2@1220,2130.47 1220,2095 1375,1940 1375,1695 1323.87,1643.87 U4.10@1323.87,1612.67
NetR32_2: R32.2 U4.7 | length 526.9
  Top Layer w6: R32.2@1420,2130.47 1420,1700 1441.98,1678.02 U4.7@1441.98,1612.67
NetR34_2: R34.2 R35.2 U4.8 | length 585.5
  Top Layer w6: R34.2@1320,2130.47 R35.2@1370,2130.47 1370,2120 1405,2085 1405,1673.03 1400,1668.03 1400,1615.28 U4.8@1402.61,1612.67
NetR39_2: R39.2 U5.4 | length 746.8
  Top Layer w6: U5.4@4252.48,1604.33 4252.48,1647.52 4140,1760 4140,1910 4275,2045 4350,2045 4430,2125 R39.2@4430,2140.47
NetR40_2: R40.2 U5.10 | length 594.8
  Top Layer w6: R40.2@3960,2135.47 3960,2040 4065,1935 4065,1700 4016.26,1651.26 U5.10@4016.26,1604.33
NetR41_2: R41.2 U5.7 | length 566.1
  Top Layer w6: U5.7@4134.37,1604.33 4134.37,1645.63 4110,1670 4110,2040 4170,2100 R41.2@4170,2135.47
NetR42_2: R42.2 R44.2 U5.8 | length 593.6
  Top Layer w6: R44.2@4015,2135.47 R42.2@4065,2135.47 4065,2065 4095,2035 U5.8@4095,1604.33
NetR48_2: R48.2 U6.4 | length 659.7
  Top Layer w6: U6.4@5242.48,1604.33 5242.48,1657.52 5170,1730 5170,1880.47 R48.2@5420,2130.47
NetR49_2: R49.2 U6.10 | length 621.8
  Top Layer w6: R49.2@4950,2130.47 4950,2046.9 5093.61,1903.29 5093.61,1753.61 5006.26,1666.26 U6.10@5006.26,1604.33
NetR50_2: R50.2 U6.7 | length 540.9
  Top Layer w6: U6.7@5124.37,1604.33 5124.37,1704.37 5140,1720 5140,1971.97 5160.53,1992.5 5160.53,2129.47 R50.2@5160,2130
NetR51_2: R51.2 R53.2 U6.8 | length 676.3
  Top Layer w6: R53.2@5005,2130.47 R51.2@5055,2130.47 5055,2075 5067.5,2062.5 5127.5,2062.5 5148.53,2041.47 5148.53,1998.53 5125,1975 5125,1740 5085,1700 U6.8@5085,1604.33
P1_M1_CURRENT_SENSE: C1.2 R8.1 U8.4 | length 2697.2
  Top Layer w6: C1.2@3110,2187.56 3111.97,2189.53 R8.1@3160,2189.53
  Top Layer w10: R8.1@3160,2189.53 3180,2209.53 v1(3180,2230) ; v1(3220,2570) 3260,2610 U8.4@5444.53,2610
  Bottom Layer w10: v1(3180,2230) 3220,2270 v1(3220,2570)
P1_M1ENA/B: "H-Bridge Pair One Pinning.4" R2.1 | length 675.3
  Top Layer w10: 2880,2395 3004,2271 3198.21,2271 3210.71,2258.5 3401.3,2258.5 3470,2189.8 R2.1@3470,2189.53
P1_M1INA: "H-Bridge Pair One Pinning.2" R3.1 | length 816.9
  Top Layer w10: 2880,2495 2925,2450 2925,2372.63 3010.63,2287 3204.83,2287 3216.83,2275 3439.53,2275 R3.1@3525,2189.53
P1_M1INB: "H-Bridge Pair One Pinning.8" R4.1 | length 177.3
  Top Layer w10: 2880,2195 2930,2195 2935.47,2189.53 R4.1@3055,2189.53
P1_M1OUTA: D1.2 D2.1 J6.1 U1.1 U1.24 U1.25 U1.30 | length 482.4
  Top Layer w25: v2(3284.37,845) U1.24@3284.37,914.01 ; v2(3323.74,845) U1.25@3323.74,914.01 ; D2.1@3368.9,625 3368.9,583.9 3358.9,573.9 D1.2@3358.9,515 3413.9,460 v1(3430,460) ; v2(3520.59,845) U1.30@3520.59,914.01 ; U1.1@3520.59,1622.67 v2(3520.59,1690)
P1_M1OUTB: J6.2 R9.1 U1.15 U1.16 U1.21 U1.22 | length 353.2
  Top Layer w25: v2(2969.41,845) U1.16@2969.41,914.01 ; U1.15@2969.41,1622.67 v2(2969.41,1690) ; v1(3100,465) 3115,480 R9.1@3115,537.6 ; v2(3166.26,845) U1.21@3166.26,914.01 ; v2(3205.63,845) U1.22@3205.63,914.01
P1_M1PWM: "H-Bridge Pair One Pinning.6" R5.1 R6.2 | length 478.7
  Top Layer w6: R5.1@3265,2189.53 R6.2@3315,2189.53
  Top Layer w10: 2880,2295 2920,2255 3191.58,2255 3257.05,2189.53 R5.1@3265,2189.53
P1_M2_CURRENT_SENSE: C5.2 R15.1 U8.3 | length 3671.4
  Top Layer w10: C5.2@2180,2187.56 2228.03,2187.56 R15.1@2230,2189.53 2230,2215 v1(2255,2240) ; v1(2305,2625) 2340,2660 U8.3@5444.53,2660
  Bottom Layer w10: v1(2255,2240) 2305,2290 v1(2305,2625)
P1_M2CS: 
P1_M2ENA/B: "H-Bridge Pair One Pinning.5" R11.1 | length 283.7
  Top Layer w10: R11.1@2540,2189.53 2547.95,2189.53 2572.73,2214.31 2699.31,2214.31 2780,2295
P1_M2INA: "H-Bridge Pair One Pinning.7" R12.1 | length 187.3
  Top Layer w10: R12.1@2595,2189.53 2774.53,2189.53 2780,2195
P1_M2INB: "H-Bridge Pair One Pinning.1" R13.1 | length 805
  Top Layer w10: R13.1@2125,2189.53 2210.47,2275 2600,2275 2780,2455 2780,2495
P1_M2OUTA: D3.2 D4.1 J7.1 U2.1 U2.24 U2.25 U2.30 | length 480.7
  Top Layer w25: v2(2294.37,845) U2.24@2294.37,914.01 ; v2(2333.74,845) U2.25@2333.74,914.01 ; D4.1@2378.9,625 2378.9,573.9 2368.9,563.9 D3.2@2368.9,510 2423.9,455 v1(2440,455) ; v2(2530.59,845) U2.30@2530.59,914.01 ; U2.1@2530.59,1622.67 v2(2530.59,1683.34)
P1_M2OUTB: J7.2 R18.1 U2.15 U2.16 U2.21 U2.22 | length 349
  Top Layer w25: v2(1979.41,845) U2.16@1979.41,914.01 ; U2.15@1979.41,1622.67 v2(1979.41,1685) ; v1(2125,460) 2130,465 R18.1@2130,537.6 ; v2(2176.26,845) U2.21@2176.26,914.01 ; v2(2215.63,845) U2.22@2215.63,914.01
P1_M2PWM: "H-Bridge Pair One Pinning.3" R14.1 R16.2 | length 535.1
  Top Layer w6: R14.1@2330,2189.53 R16.2@2380,2189.53
  Top Layer w10: R16.2@2380,2189.53 2386.29,2189.53 2455.27,2258.5 2643.5,2258.5 2780,2395